# EAGLE board osi-power_dc_rev_0 (EAGLE 6.3)
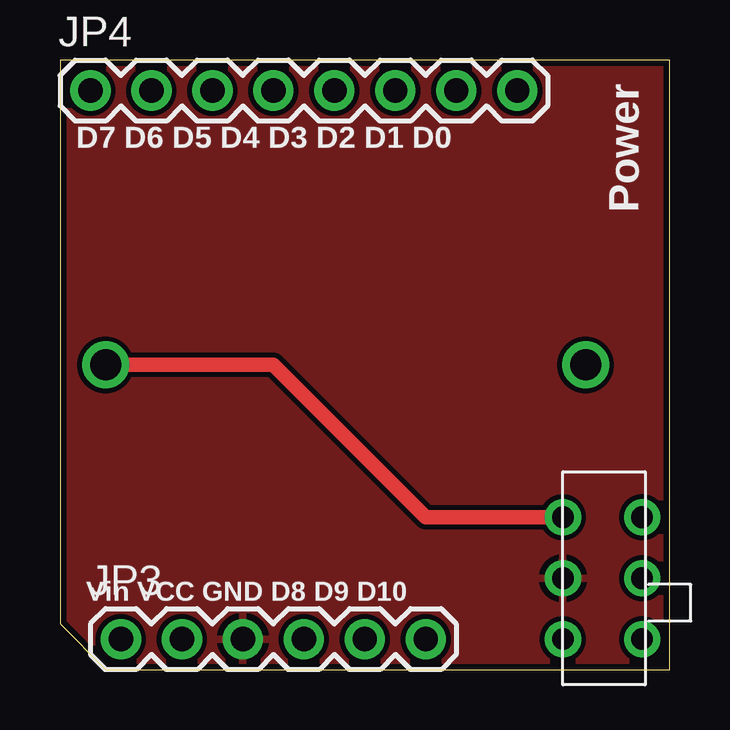
[diagram p0: board, top side]
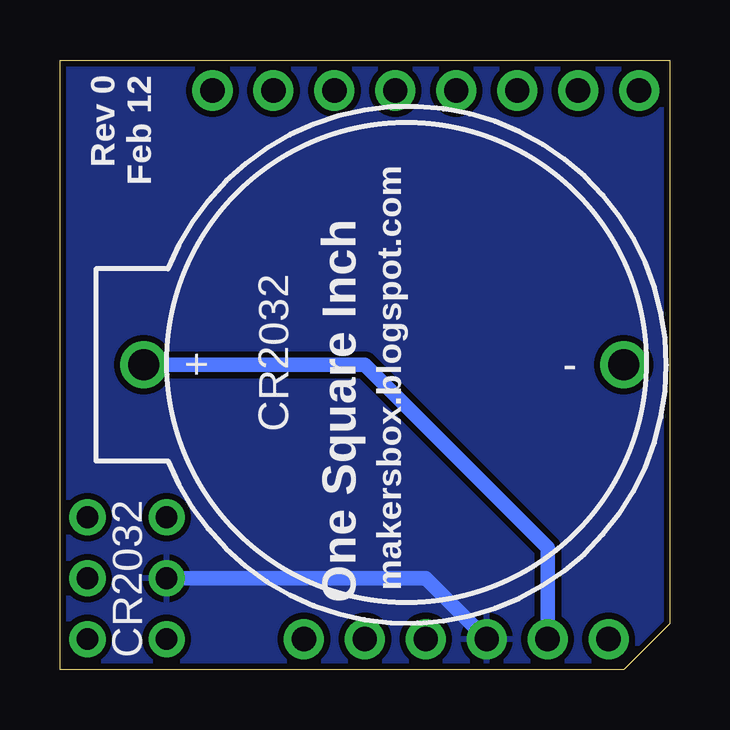
[diagram p1: board, bottom side, seen from below]

Size 25.4 x 25.4 mm. Coordinates in mm from the lower left corner, seen from the top.
Outline: 0,24.77 0,25.4 24.77,25.4 24.77,25.4 25.4,25.4 25.4,0 24.77,0 24.77,0 1.91,0 0,1.91 0,24.77
Outline: 0,24.77 0,24.77
Copper layers (1*16): Top 0.035mm / dielectric 1.5mm / Bottom 0.035mm
Design rules "SparkFun": minimum track width 8mil, minimum drill 20mil, track to track 8mil, track to pad 8mil, pad to pad 8mil, via to via 8mil, smd to smd 8mil, copper to edge 10mil, drill to drill 8mil, minimum pad ring 12mil, minimum via ring 10mil, stop-mask expansion 4mil, vias tented up to drill 25mil, thermal gap 10mil

## Footprints (pad centres in the part's own frame; a part is rotated, then mirrored left to right if it is on the bottom)
BATTCOM_20MM_PTH = drill 1.3: 1 20,0; 2 0,0
1X06 = drill 1.016 pad 1.676: 1 0,0; 2 2.54,0; 3 5.08,0; 4 7.62,0; 5 10.16,0; 6 12.7,0
1X08 = drill 1.016 pad 1.676: 1 0,0; 2 2.54,0; 3 5.08,0; 4 7.62,0; 5 10.16,0; 6 12.7,0; 7 15.24,0; 8 17.78,0
SWITCH = drill 0.9: 1 -2.54,2.54; 2 0,2.54; 3 2.54,2.54; 4 -2.54,-0.762; 5 0,-0.762; 6 2.54,-0.762

## Placement (x,y rotation side)
BAT  [BATTCOM_20MM_PTH]  1.91,12.7 0 top
JP3  [1X06]  2.54,1.27 0 top
JP4  [1X08]  1.27,24.13 0 top
U$1  SWITCH  [SWITCH]  23.5,3.81 90 top

## Library data of the parts
BAT JP3 JP4 = SparkFun_mod
U$1 = _my-parts

## Nets
D0: JP4.8
D1: JP4.7
D2: JP4.6
D3: JP4.5
D4: JP4.4
D5: JP4.3
D6: JP4.2
D7: JP4.1
D8: JP3.4
D9: JP3.5
D10: JP3.6
GND: JP3.3 U$1.2
N$1: BAT.2 U$1.3
V+: JP3.1
VCC: BAT.1 JP3.2

## Tracks (layer width: path | path; a pad name or v marks a point on that pad's centre or on a via)
GND
  Bottom 0.61: U$1.2 10.16,3.81 JP3.3
  pour Bottom (isolate 0.254): -1.27,26.67 26.67,26.67 26.67,-1.27 -1.27,-1.27
  pour Top: -0.64,26.04 26.67,26.04 26.67,0 26.04,-0.64 -0.64,-0.64
N$1
  Top 0.61: BAT.2 8.89,12.7 15.24,6.35 U$1.3
VCC
  Bottom 0.61: BAT.1 12.7,12.7 5.08,5.08 JP3.2

## Text on the board
tPlace: D7 D6 D5 D4 D3 D2 D1 D0 | Power | Vin VCC GND D8 D9 D10
bPlace: Rev 0 / Feb 12 | makersbox.blogspot.com | One Square Inch | CR2032